# Altium PCB ps2-blueretro.PcbDoc
Units mm, origin at the board's own origin, x right, y up, seen from the top; angles counter-clockwise.
Board outline 70 x 50 mm, 2 copper layers (Top Layer, Bottom Layer); 51 components, 56 nets, 202 pads, 38 vias.
Unrouted connection lines stored in the file: 1.
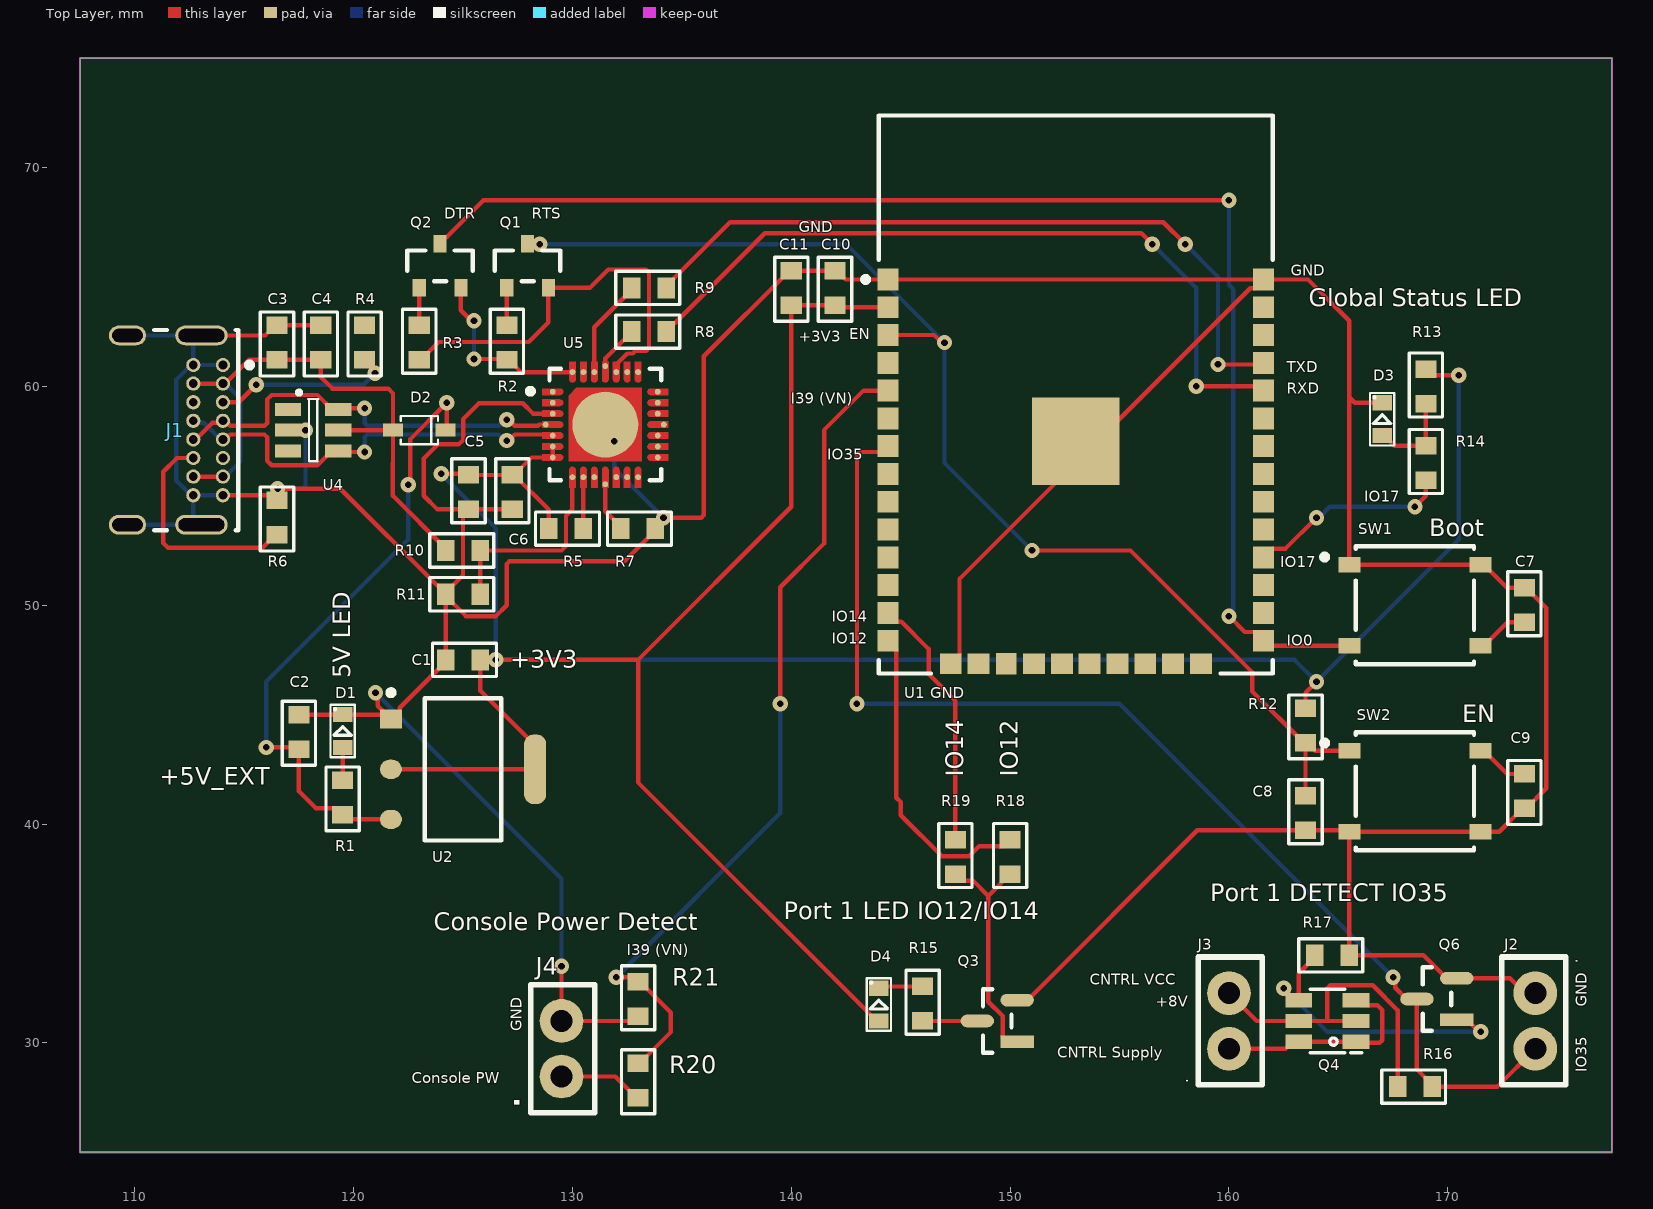
[diagram p0: Top Layer view]
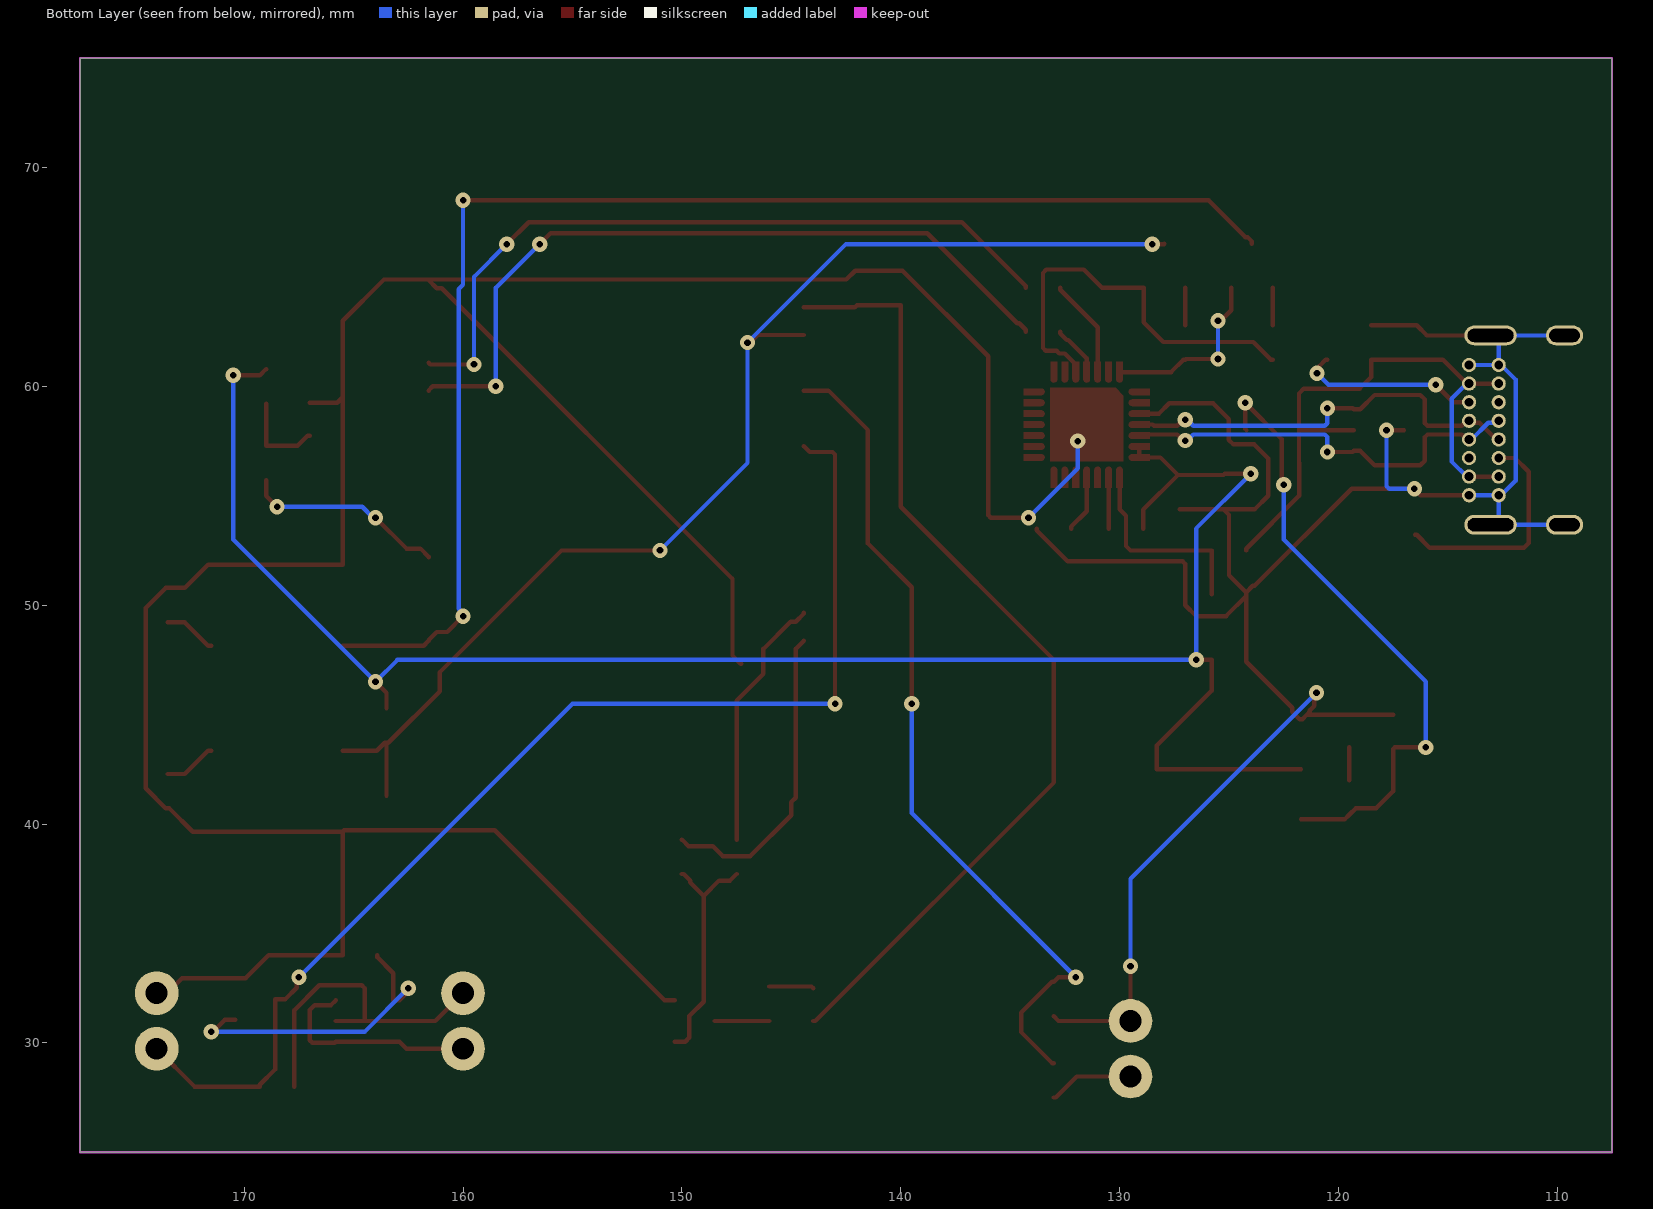
[diagram p1: Bottom Layer view, seen from below]
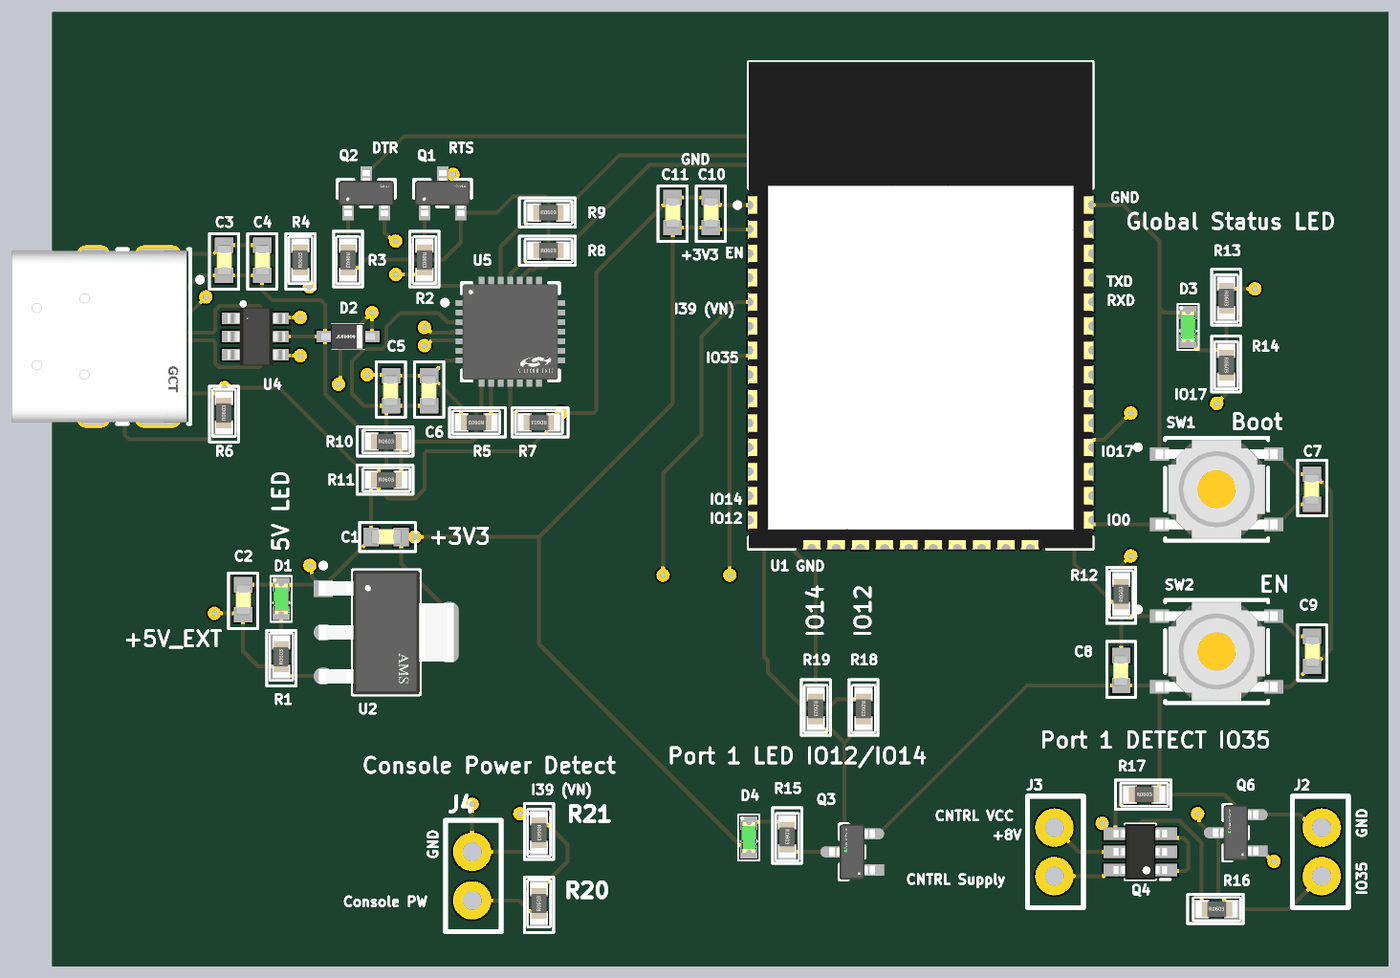
[diagram p2: 3D render of the assembled board from above, using the file's embedded part models]

## Layer stack, top to bottom
Top Solder: solder mask 0.0102, Solder Resist, Dk 3.5
Top Layer: signal copper 0.0356
Dielectric 1: dielectric 0.32, FR-4, Dk 4.8
Bottom Layer: signal copper 0.0356
Bottom Solder: solder mask 0.0102, Solder Resist, Dk 3.5

## Board outline
107.5,25 177.5,25 177.5,75 107.5,75

## Design rules (kind name [scope] priority, off if disabled: settings)
Clearance [All] p1: gap=0.254 ignorepadtopadclearanceinfootprint=FALSE except(0: Arc-Hole Track-Hole SMDPad-Hole THPad-Hole Via-Hole Fill-Hole Poly-Hole Region-Hole Text-Hole)
DiffPairsRouting DiffPairsRouting_1 [All] p1 off: maxlimit=0.5 minlimit=0.15 mostfreqgap=0.2 toplayer_minwidth=0.2 toplayer_maxwidth=0.2 toplayer_prefwidth=0.2 bottomlayer_minwidth=0.2 bottomlayer_maxwidth=0.2 bottomlayer_prefwidth=0.2 maxuncoupledlength=12.7
DiffPairsRouting USB_DATA [InDifferentialPair('USB_DATA')] p2: maxlimit=0.5 minlimit=0.15 mostfreqgap=0.2 toplayer_minwidth=0.2 toplayer_maxwidth=0.2 toplayer_prefwidth=0.2 bottomlayer_minwidth=0.2 bottomlayer_maxwidth=0.2 bottomlayer_prefwidth=0.2 maxuncoupledlength=12.7
MatchedLengths [InDifferentialPair('USB_DATA')] p1: tolerance=0.051 checknetsindiffpair=TRUE checkdiffpairvsdiffpair=FALSE checkxsignals=FALSE checkothers=FALSE
PolygonConnect [All] p1: connectstyle=Relief reliefconductorwidth=0.254 reliefentries=4 polygonreliefangle="90 Angle" airgapwidth=0.254
RoomDefinition U_06-DETECT-ps2-blueretro [InComponentClass('U_06-DETECT-ps2-blueretro')] p1: confinementstyle=ConfineIn formatcopy=TRUE lockcomponents=FALSE outline 179,27.5 197,27.5 197,35 179,35
RoomDefinition U_03-PSU-ps2-blueretro [InComponentClass('U_03-PSU-ps2-blueretro')] p2: confinementstyle=ConfineIn formatcopy=TRUE lockcomponents=FALSE outline 0,0 280.5,0 280.5,143.5 0,143.5
RoomDefinition U_02-USB-ps2-blueretro [InComponentClass('U_02-USB-ps2-blueretro')] p3: confinementstyle=ConfineIn formatcopy=TRUE lockcomponents=FALSE outline 2.6,0 294.6,0 294.6,168.8 2.6,168.8
RoomDefinition U_04-CTRL1-ps2-blueretro [InComponentClass('U_04-CTRL1-ps2-blueretro')] p4: confinementstyle=ConfineIn formatcopy=TRUE lockcomponents=FALSE outline 0,0 205.1,0 205.1,145.6 0,145.6
RoutingVias [All] p1: holewidth=0.3 width=0.7 viastyle="Through Hole" minholewidth=0.3 minwidth=0.7 maxholewidth=0.45 maxwidth=1.27
SolderMaskExpansion [All] p1: expansion=0.102 istentingtop=FALSE
Width [All] p1: maxlimit=1 minlimit=0.2 preferedwidth=0.2
29 further rules are at their usual default settings.

## Classes and differential pairs
component class U_06-DETECT-ps2-blueretro: J4 R20 R21
component class U_04-CTRL1-ps2-blueretro: D4 J2 J3 Q3 Q4 Q6 R15 R16 R17 R18 R19
component class U_01-ESP32-ps2-blueretro: C7 C8 C9 C10 C11 D3 R12 R13 R14 SW1 SW2 U1
component class U_02-USB-ps2-blueretro: C3 C4 C5 C6 D2 J1 Q1 Q2 R2 R3 R4 R5 R6 R7 R8 R9 R10 R11 U4 U5
component class U_03-PSU-ps2-blueretro: C1 C2 D1 R1 U2
differential pair USB_DATA: +USB_DATA_P -USB_DATA_N

## Components (designator, comment, footprint, x,y, rotation, side; value= is the part's Value field where it differs from the comment)
C1 "cap_0603" cap_0603 125,47.5 r0 top value=22uF/10V
C2 "cap_0603" cap_0603 117.5,44.213 r270 top value=22uF/10V
C3 "cap_0603" cap_0603 116.5,62 r270 top value=1uF
C4 "cap_0603" cap_0603 118.5,62 r270 top value=0.1uF/50V
C5 "cap_0603" cap_0603 125.25,55.163 r90 top value=10uF/10V
C6 "cap_0603" cap_0603 127.25,55.163 r90 top value=0.1uF/50V
C7 "cap_0603" cap_0603 173.5,50 r90 top value=0.1uF/50V
C8 "cap_0603" cap_0603 163.5,40.5 r90 top value=0.1uF/50V
C9 "cap_0603" cap_0603 173.5,41.5 r270 top value=0.1uF/50V
C10 "cap_0603" cap_0603 142,64.5 r270 top value=22uF/10V
C11 "cap_0603" cap_0603 140,64.5 r270 top value=0.1uF/50V
D1 "led_0603" led0603_GREEN 119.5,44.25 r90 top value=Green
D2 "BAT760-7" sod-323 123,58 r180 top
D3 "led_0603" led0603_GREEN 167,58.5 r90 top value=Green
D4 "led_0603" led0603_GREEN 144,31.75 r90 top value=Green
J1 "USB4085-GF-A" FP-USB4085-GF-A-MFG 110,58 r270 top
J2 "2 Pole 2.54mm" 2.54mm_2pole 174,31 r270 top
J3 "2 Pole 2.54mm" 2.54mm_2pole 160,31 r90 top
J4 "2 Pole 2.54mm" 2.54mm_2pole 129.5,29.73 r90 top
Q1 "SS8050-G" FP-SS8050-G-MFG 127.95,65.51 r90 top
Q2 "SS8050-G" FP-SS8050-G-MFG 123.95,65.51 r90 top
Q3 "BSS138" FP-318-08-IPC_B 149.41,31 r180 top
Q4 "PJS6839" SOT23-6 164.5,31 r90 top
Q6 "BSS138" FP-318-08-IPC_B 169.5,32 r180 top
R1 "res_0603" res_0603 119.5,41.213 r270 top value=2k
R2 "res_0603" res_0603 127,62 r90 top value=10k
R3 "res_0603" res_0603 123,62 r90 top value=10k
R4 "res_0603" res_0603 120.5,62 r270 top value=5k1
R5 "res_0603" res_0603 129.712,53.5 r0 top value=2k
R6 "res_0603" res_0603 116.5,54 r270 top value=5k1
R7 "res_0603" res_0603 133,53.5 r0 top value=10k
R8 "res_0603" res_0603 133.5,62.5 r180 top value=0R
R9 "res_0603" res_0603 133.5,64.5 r180 top value=0R
R10 "res_0603" res_0603 125,52.5 r180 top value=22k1
R11 "res_0603" res_0603 125,50.5 r180 top value=47k5
R12 "res_0603" res_0603 163.5,44.5 r270 top value=10k
R13 "res_0603" res_0603 169,60 r90 top value=1k
R14 "res_0603" res_0603 169,56.5 r90 top value=1k
R15 "res_0603" res_0603 146,31.787 r90 top value=64R9
R16 "res_0603" res_0603 168.5,28 r180 top value=100k
R17 "res_0603" res_0603 164.713,34 r180 top value=4k7
R18 "res_0603" res_0603 150,38.5 r90 top value=0R
R19 "res_0603" res_0603 147.5,38.5 r90 top value=0R
R20 "res_0603" res_0603 133,28.288 r270 top value=10k
R21 "res_0603" res_0603 133,32 r90 top value=20k
SW1 "PTS526SK15SMTR2LFS" FP-PTS526SK15SMTR2LFS-MFG 168.5,50 r0 top
SW2 "PTS526SK15SMTR2LFS" FP-PTS526SK15SMTR2LFS-MFG 168.5,41.5 r0 top
U1 "ESP-WROOM-32" OLMX-ESP-WROOM-32 153,56.105 r0 top
U2 "AMS1117-3.3" FP-AMS1117-IPC_C 125,42.5 r0 top
U4 "USBLC6-2SC6" sot23-6l 117,58.95 r0 top
U5 "CP2102N-A02-GQFN28R" FP-CP2102N-A02-GQFN28R-MFG 131.5,58.25 r0 top

## Footprints (in the part's own frame and the unit in brackets; to place one, negate y for a bottom-side part, rotate by r counter-clockwise, add the part's x,y. Pads: shape width x height; smd on the part's side, far side on the other; paste and mask are expansions set on the pad)
2.54mm_2pole [mm]
  round 2 hole 1: 1(-1.27,0) 2(1.27,0)
  silkscreen extent -2.92,-1.52 2.92,1.4
cap_0603 [mm]
  rect 0.8x0.965 smd: 1(-0.787,0) 2(0.788,0)
  silkscreen extent -1.4,-0.76 1.52,0.76, body extent -0.8,-0.38 0.8,0.42, height 0.8
FP-318-08-IPC_B [mm]
  rect 1.524x0.578 smd paste+0 mask+0: 1(-0.91,0.95)
  rrect100% 1.524x0.578 smd paste+0 mask+0: 2(-0.91,-0.95) 3(0.91,0)
  silkscreen extent -0.65,-1.45 0.65,1.45, body extent -1.92,-1.7 1.92,1.7, height 0.25
FP-AMS1117-IPC_C [mm]
  rect 1.004x0.872 smd paste+0 mask+0: 1(-3.295,2.29)
  rrect100% 1.004x0.872 smd paste+0 mask+0: 2(-3.295,0) 3(-3.295,-2.29)
  rrect87% 1.004x3.182 smd paste+0 mask+0: 4(3.295,0)
  silkscreen extent -3.42,-3.25 1.75,3.62, body extent -3.9,-3.35 3.9,3.35, height 0.25
FP-CP2102N-A02-GQFN28R-MFG [mm]
  round 0.27 smd paste+0 mask+0: 1(-2.4,1.5) 2(-2.4,1) 3(-2.4,0.5) 4(-2.725,0) 5(-2.4,-0.5) 6(-2.4,-1) 7(-2.4,-1.5) 8(-1.5,-2.4) 9(-1,-2.4) 10(-0.5,-2.4) 11(0,-2.725) 12(0.5,-2.4) 13(1,-2.4) 14(1.5,-2.4) 15(2.4,-1.5) 16(2.4,-1) 17(2.4,-0.5) 18(2.675,0) 19(2.4,0.5) 20(2.4,1) 21(2.4,1.5) 22(1.5,2.4) 23(1,2.4) 24(0.5,2.4) 25(0,2.675) 26(-0.5,2.4) 27(-1,2.4) 28(-1.5,2.4)
  round 3.015 smd paste-1000 mask+0: 29(0,0)
  Top Layer region: -1.325,1.675 1.675,1.675 1.675,-1.675 -1.675,-1.675 -1.675,1.325 -1.325,1.675
  Top Layer region: -1.35,2.875 -1.35,2.075 -1.361,2.018 -1.394,1.969 -1.443,1.936 -1.5,1.925 -1.5,1.925 -1.557,1.936 -1.606,1.969 -1.639,2.018 -1.65,2.075 -1.65,2.075 -1.65,2.875
  Top Layer region: -0.85,2.875 -0.85,2.075 -0.861,2.018 -0.894,1.969 -0.943,1.936 -1,1.925 -1,1.925 -1.057,1.936 -1.106,1.969 -1.139,2.018 -1.15,2.075 -1.15,2.075 -1.15,2.875
  Top Layer region: -0.35,2.875 -0.35,2.075 -0.361,2.018 -0.394,1.969 -0.443,1.936 -0.5,1.925 -0.5,1.925 -0.557,1.936 -0.606,1.969 -0.639,2.018 -0.65,2.075 -0.65,2.075 -0.65,2.875
  Top Layer region: 0.15,2.875 0.15,2.075 0.139,2.018 0.106,1.969 0.057,1.936 0,1.925 0,1.925 -0.057,1.936 -0.106,1.969 -0.139,2.018 -0.15,2.075 -0.15,2.075 -0.15,2.875
  Top Layer region: 0.65,2.875 0.65,2.075 0.639,2.018 0.606,1.969 0.557,1.936 0.5,1.925 0.5,1.925 0.443,1.936 0.394,1.969 0.361,2.018 0.35,2.075 0.35,2.075 0.35,2.875
  Top Layer region: 1.15,2.875 1.15,2.075 1.139,2.018 1.106,1.969 1.057,1.936 1,1.925 1,1.925 0.943,1.936 0.894,1.969 0.861,2.018 0.85,2.075 0.85,2.075 0.85,2.875
  Top Layer region: 1.65,2.875 1.65,2.075 1.639,2.018 1.606,1.969 1.557,1.936 1.5,1.925 1.5,1.925 1.443,1.936 1.394,1.969 1.361,2.018 1.35,2.075 1.35,2.075 1.35,2.875
  Top Layer region: 2.875,1.35 2.075,1.35 2.018,1.361 1.969,1.394 1.936,1.443 1.925,1.5 1.925,1.5 1.936,1.557 1.969,1.606 2.018,1.639 2.075,1.65 2.075,1.65 2.875,1.65
  Top Layer region: 2.875,0.85 2.075,0.85 2.018,0.861 1.969,0.894 1.936,0.943 1.925,1 1.925,1 1.936,1.057 1.969,1.106 2.018,1.139 2.075,1.15 2.075,1.15 2.875,1.15
  Top Layer region: 2.875,0.35 2.075,0.35 2.018,0.361 1.969,0.394 1.936,0.443 1.925,0.5 1.925,0.5 1.936,0.557 1.969,0.606 2.018,0.639 2.075,0.65 2.075,0.65 2.875,0.65
  Top Layer region: 2.875,-0.15 2.075,-0.15 2.018,-0.139 1.969,-0.106 1.936,-0.057 1.925,0 1.925,0 1.936,0.057 1.969,0.106 2.018,0.139 2.075,0.15 2.075,0.15 2.875,0.15
  Top Layer region: 2.875,-0.65 2.075,-0.65 2.018,-0.639 1.969,-0.606 1.936,-0.557 1.925,-0.5 1.925,-0.5 1.936,-0.443 1.969,-0.394 2.018,-0.361 2.075,-0.35 2.075,-0.35 2.875,-0.35
  Top Layer region: 2.875,-1.15 2.075,-1.15 2.018,-1.139 1.969,-1.106 1.936,-1.057 1.925,-1 1.925,-1 1.936,-0.943 1.969,-0.894 2.018,-0.861 2.075,-0.85 2.075,-0.85 2.875,-0.85
  Top Layer region: 2.875,-1.65 2.075,-1.65 2.018,-1.639 1.969,-1.606 1.936,-1.557 1.925,-1.5 1.925,-1.5 1.936,-1.443 1.969,-1.394 2.018,-1.361 2.075,-1.35 2.075,-1.35 2.875,-1.35
  Top Layer region: 1.35,-2.875 1.35,-2.075 1.361,-2.018 1.394,-1.969 1.443,-1.936 1.5,-1.925 1.5,-1.925 1.557,-1.936 1.606,-1.969 1.639,-2.018 1.65,-2.075 1.65,-2.075 1.65,-2.875
  Top Layer region: 0.85,-2.875 0.85,-2.075 0.861,-2.018 0.894,-1.969 0.943,-1.936 1,-1.925 1,-1.925 1.057,-1.936 1.106,-1.969 1.139,-2.018 1.15,-2.075 1.15,-2.075 1.15,-2.875
  Top Layer region: 0.35,-2.875 0.35,-2.075 0.361,-2.018 0.394,-1.969 0.443,-1.936 0.5,-1.925 0.5,-1.925 0.557,-1.936 0.606,-1.969 0.639,-2.018 0.65,-2.075 0.65,-2.075 0.65,-2.875
  Top Layer region: -0.15,-2.875 -0.15,-2.075 -0.139,-2.018 -0.106,-1.969 -0.057,-1.936 0,-1.925 0,-1.925 0.057,-1.936 0.106,-1.969 0.139,-2.018 0.15,-2.075 0.15,-2.075 0.15,-2.875
  Top Layer region: -0.65,-2.875 -0.65,-2.075 -0.639,-2.018 -0.606,-1.969 -0.557,-1.936 -0.5,-1.925 -0.5,-1.925 -0.443,-1.936 -0.394,-1.969 -0.361,-2.018 -0.35,-2.075 -0.35,-2.075 -0.35,-2.875
  Top Layer region: -1.15,-2.875 -1.15,-2.075 -1.139,-2.018 -1.106,-1.969 -1.057,-1.936 -1,-1.925 -1,-1.925 -0.943,-1.936 -0.894,-1.969 -0.861,-2.018 -0.85,-2.075 -0.85,-2.075 -0.85,-2.875
  Top Layer region: -1.65,-2.875 -1.65,-2.075 -1.639,-2.018 -1.606,-1.969 -1.557,-1.936 -1.5,-1.925 -1.5,-1.925 -1.443,-1.936 -1.394,-1.969 -1.361,-2.018 -1.35,-2.075 -1.35,-2.075 -1.35,-2.875
  Top Layer region: -2.875,-1.35 -2.075,-1.35 -2.018,-1.361 -1.969,-1.394 -1.936,-1.443 -1.925,-1.5 -1.925,-1.5 -1.936,-1.557 -1.969,-1.606 -2.018,-1.639 -2.075,-1.65 -2.075,-1.65 -2.875,-1.65
  Top Layer region: -2.875,-0.85 -2.075,-0.85 -2.018,-0.861 -1.969,-0.894 -1.936,-0.943 -1.925,-1 -1.925,-1 -1.936,-1.057 -1.969,-1.106 -2.018,-1.139 -2.075,-1.15 -2.075,-1.15 -2.875,-1.15
  Top Layer region: -2.875,-0.35 -2.075,-0.35 -2.018,-0.361 -1.969,-0.394 -1.936,-0.443 -1.925,-0.5 -1.925,-0.5 -1.936,-0.557 -1.969,-0.606 -2.018,-0.639 -2.075,-0.65 -2.075,-0.65 -2.875,-0.65
  Top Layer region: -2.875,0.15 -2.075,0.15 -2.018,0.139 -1.969,0.106 -1.936,0.057 -1.925,0 -1.925,0 -1.936,-0.057 -1.969,-0.106 -2.018,-0.139 -2.075,-0.15 -2.075,-0.15 -2.875,-0.15
  Top Layer region: -2.875,0.65 -2.075,0.65 -2.018,0.639 -1.969,0.606 -1.936,0.557 -1.925,0.5 -1.925,0.5 -1.936,0.443 -1.969,0.394 -2.018,0.361 -2.075,0.35 -2.075,0.35 -2.875,0.35
  Top Layer region: -2.875,1.15 -2.075,1.15 -2.018,1.139 -1.969,1.106 -1.936,1.057 -1.925,1 -1.925,1 -1.936,0.943 -1.969,0.894 -2.018,0.861 -2.075,0.85 -2.075,0.85 -2.875,0.85
  Top Layer region: -2.875,1.65 -2.075,1.65 -2.018,1.639 -1.969,1.606 -1.936,1.557 -1.925,1.5 -1.925,1.5 -1.936,1.443 -1.969,1.394 -2.018,1.361 -2.075,1.35 -2.075,1.35 -2.875,1.35
  silkscreen extent -3.55,-2.55 2.55,2.55, body extent -2.98,-2.98 2.98,2.98, height 0.25
FP-PTS526SK15SMTR2LFS-MFG [mm]
  rect 1x0.7 smd paste+0 mask+0: 1(-3,1.85) 2(3,1.85) 3(-3,-1.85) 4(3,-1.85)
  silkscreen extent -4.25,-2.7 2.7,2.7, body extent -3.6,-2.8 3.6,2.8, height 0.25
FP-SS8050-G-MFG [mm]
  rect 0.8x0.6 smd paste+0 mask+0: 1(-1.01,0.95) 2(-1.01,-0.95) 3(1.01,0)
  silkscreen extent -0.7,-1.5 0.7,1.5, body extent -1.51,-1.6 1.51,1.6, height 0.25
FP-USB4085-GF-A-MFG [mm]
  rrect100% 0.9x2.4 hole 2.1 slot 0.6 at 0 deg paste-1000 mask+0: 1(-4.325,3.045) 2(4.325,3.045)
  rrect100% 0.9x1.7 hole 1.4 slot 0.6 at 0 deg paste-1000 mask+0: 3(-4.325,-0.335) 4(4.325,-0.335)
  round 0.65 hole 0.4 paste-1000 mask+0: A1(-2.975,4.025) A4(-2.125,4.025) A5(-1.275,4.025) A6(-0.425,4.025) A7(0.425,4.025) A8(1.275,4.025) A9(2.125,4.025) A12(2.975,4.025) B1(2.975,2.675) B4(2.125,2.675) B5(1.275,2.675) B6(0.425,2.675) B7(-0.425,2.675) B8(-1.275,2.675) B9(-2.125,2.675) B12(-2.975,2.675)
  silkscreen extent -4.57,0.89 4.57,5.37, body extent -4.87,-4.83 4.87,4.83, height 0.25
led0603_GREEN [mm] "LED Green, 2-Leads, Body 1.6x0.8mm"
  rect 0.7x0.9 smd: 1(-0.75,0) 2(0.75,0)
  silkscreen extent -1.2,-0.55 1.2,0.55, body extent -0.81,-0.4 0.81,0.4, height 0.6
OLMX-ESP-WROOM-32 [mm] "SMD, 38-Leads, Body 18x25.5mm, Pitch 1.27mm"
  rect 0.95x1 smd: 1(-8.575,8.78) 2(-8.575,7.51) 3(-8.575,6.24) 4(-8.575,4.97) 5(-8.575,3.7) 6(-8.575,2.43) 7(-8.575,1.16) 8(-8.575,-0.11) 9(-8.575,-1.38) 10(-8.575,-2.65) 11(-8.575,-3.92) 12(-8.575,-5.19) 13(-8.575,-6.46) 14(-8.575,-7.73) 17(-3.175,-8.78) 25(8.575,-7.73) 26(8.575,-6.46) 27(8.575,-5.19) 28(8.575,-3.92) 29(8.575,-2.65) 30(8.575,-1.38) 31(8.575,-0.11) 32(8.575,1.16) 33(8.575,2.43) 34(8.575,3.7) 35(8.575,4.97) 36(8.575,6.24) 37(8.575,7.51) 38(8.575,8.78)
  rect 4x4 smd: 1(0,1.395)
  rect 1x0.95 smd: 15(-5.715,-8.78) 16(-4.445,-8.78) 18(-1.905,-8.78) 19(-0.635,-8.78) 20(0.635,-8.78) 21(1.905,-8.78) 22(3.175,-8.78) 23(4.445,-8.78) 24(5.715,-8.78)
  silkscreen extent -9.72,-9.23 9,16.27, body extent -9.04,-9.25 9.04,16.29, height 3.04
res_0603 [mm]
  rect 0.8x0.965 smd: 1(-0.787,0) 2(0.788,0)
  silkscreen extent -1.4,-0.76 1.52,0.76, body extent -1.3,-0.67 1.3,0.67, height 0.47
sod-323 [mm]
  rect 0.9x0.6 smd: 1(-1.2,0) 2(1.2,0)
  silkscreen extent -0.85,-0.65 0.85,0.65, body extent -1.4,-0.67 1.4,0.68, height 0.75
SOT23-6 [mm]
  rect 0.65x1.22 smd: 1(-0.95,-1.31) 2(0,-1.31) 3(0.95,-1.31) 4(0.95,1.31) 5(0,1.31) 6(-0.95,1.31)
  silkscreen extent -1.45,-1.57 1.45,0.8, body extent -1.45,-1.4 1.45,1.4, height 1.45
sot23-6l [mm]
  rect 1.2x0.6 smd: 1(0,0) 2(0,-0.95) 3(0,-1.9) 4(2.3,-1.9) 5(2.3,-0.95) 6(2.3,0)
  silkscreen extent 0.45,-2.38 1.39,0.82, body extent -0.3,-2.47 2.7,0.57, height 1.45

## Part data
D1 D3 D4: "Green 3,2V 20mA", Manufacturer="Würth Elektronik", Manufacturer Part Number=150060GS75000, Supplier Part Number=732-4971-1-ND, ComponentLink1Description="Supplier Link", ComponentLink1URL=https://www.digikey.at/de/products/detail/w%C3%BCrth-elektronik/150060GS75000/4489898, ComponentLink2Description="Manufacturer Link", ComponentLink3Description="Datasheet Link", ComponentLink3URL=https://www.we-online.com/components/products/datasheet/150060GS75000.pdf, Price=0,14, Supplier=Digikey
D2: "30V 1A, Vf=495mV @ 1A, Ir=50µA @ 15V Schottky Diode", Manufacturer="Diodes Incorporated", Supplier Part Number=BAT760DICT-ND, ComponentLink1Description="Supplier Link", ComponentLink1URL=https://www.digikey.at/de/products/detail/diodes-incorporated/BAT760-7/697106, ComponentLink2Description="Manufacturer Link", ComponentLink3Description="Datasheet Link", ComponentLink3URL=https://www.diodes.com/assets/Datasheets/BAT760.pdf, Manufacturer Part Number=BAT760-7, Price=0,48, Supplier=Digikey
J1: library part CMP-196119-000001-2, "CONN RCPT USB2.0 TYPE C 24POS RA", Contact Material="Copper Alloy", Contact Plating=Gold, Gender=Receptacle, Number of Positions=16, Orientation="Right Angle", Usb Standard="USB 2.0"
J2 J3 J4: "Solder contacts for a 2.54mm connector"
Q1 Q2: library part CMP-20235-000001-1, "NPN TRANSISTOR 1.5A 40V SOT-23 R", Case/Package=TO-236-3, Collector Emitter Breakdown Voltage=25V, Collector Emitter Voltage (VCEO)=400mV, Max Collector Current=1.5A, Max Power Dissipation=300mW, Transition Frequency=100MHz, Max Breakdown Voltage=25V, Mount="Surface Mount", Packaging="Tape and Reel", RoHS Compliant=Yes
Q3 Q6: library part CMP-07173-000101-1, "MOSFET N-CH 50V 220MA SOT-23", Case/Package=SOT-23, Continuous Drain Current (ID)=220mA, Drain to Source Breakdown Voltage=50V, Drain to Source Resistance=3.5R, Gate to Source Voltage (Vgs)=20V, Input Capacitance=27pF, Max Operating Temperature=150°C, Max Power Dissipation=360mW, Min Operating Temperature=-55°C, On-State Resistance=6R, Package Quantity=1, Threshold Voltage=1.3V, Contact Plating=Tin, Current Rating=220mA, Drain to Source Voltage (Vdss)=50V, Dual Supply Voltage=50V, Element Configuration=Single, Fall Time=9ns, Height=0.93mm, Lead Free="Lead Free", Length=2.92mm, Mount="Surface Mount", Nominal Vgs=1.3V, Number of Elements=1, Number of Pins=3, Packaging="Tape and Reel", Power Dissipation=360mW, Radiation Hardening=No, Rds On Max=3.5R, REACH SVHC="No SVHC", Rise Time=9ns, Termination=SMD/SMT, Turn-Off Delay Time=20ns, Turn-On Delay Time=2.5ns, Voltage Rating (DC)=50V, Weight=0.03g, Width=1.3mm
Q4: "MOSFET P-CH 60V 300mA SOT-23-6", Manufacturer="Panjit International Inc.", Manufacturer Part Number=PJS6839_S1_00001, Supplier Part Number=3757-PJS6839_S1_00001CT-ND, ComponentLink1Description=Datasheet, ComponentLink1URL=https://www.panjit.com.tw/upload/datasheet/PJS6839.pdf, ComponentLink2Description=Supplier, ComponentLink2URL=https://www.digikey.at/en/products/detail/panjit-international-inc/PJS6839-S1-00001/15799236, Price=0.28, Supplier=Digikey
SW1 SW2: library part CMP-10040-000013-1, "TACT 5.2 X 5.2, 1.5 MM H, 260GF,", Contact Current Rating=50mA, Contact Resistance=100mΩ, Manufacturer=C&K, Operating Force=250gf, Temperature="-20°C to +70°C", Temperature Range High=+70°C, Temperature Range Low=-20°C, Voltage Rating Dc=12V, Automotive=No, Category=Switch, ComponentLink2Description=Datasheet, ComponentLink2URL=https://www.ckswitches.com/media/2780/pts526.pdf, Device Class L1=Electromechanical, Device Class L2=Switches, Device Class L3="Tactile Switches", Digikey Description="TACT 5.2 X 5.2, 1.5 MM H, 260GF,", Electromechanical Life=200000Cycles, Height=1.65mm, Lead Free=Yes, Manufacturer Part Number=PTS526SK15SMTR2LFS, Octopart=https://octopart.com/pts526+sk15+smtr2+lfs-c%26k+components-100617999, Package=PTS526SK15SMTR2LFS, RoHS=TRUE, Standoff Height=0mm, Throw Configuration=SPST-NO
U1: library part CMP-2000-07454-1, "Espressif System, 2.7 to 3.6 V, -40 to 85 degC, 38-Pin SMD", Manufacturer=Olimex, Package Description="38-Pin Surface Mount Device, Body 18 x 25.5 mm, Pitch 1.27 mm", Datasheet URL=http://www.espressif.com/sites/default/files/documentation/esp-wroom-32_datasheet_en.pdf, Datasheet Version="Rev. 2.1, 09/2017", Manufacturer URL=https://www.olimex.com, Mounting Technology=SurfaceMount, Package Reference=ESP-WROOM-32, RoHSCompliant=false
U2: library part CMP-209535-000001-1, "LDO Voltage Regulators 1A, 3.3V", Dropout Voltage=1.1V, Manufacturer="Advanced Monolithic Systems", Max Junction Temp=+125°C, Max Power Dissipation=1.2W, Max Supply Voltage=15V, Nominal Supply Current=5mA, Output Current=1A, Output Voltage=3.3V, Package=AMS1117, Temperature="-40°C to +125°C", Temperature Range Low=-40°C, Automotive=No, Category=IC, ComponentLink2Description=Datasheet, ComponentLink2URL=http://www.advanced-monolithic.com/pdf/ds1117.pdf, Device Class L1="Integrated Circuits (ICs)", Device Class L2="Power Management ICs", Device Class L3="Voltage Regulators - Linear", Height=1.8mm, Ipc Land Pattern Name=SOT229P700X180-4, Lead Free=Yes, Manufacturer Part Number=AMS1117-3.3, Number Of Outputs=1, Octopart=https://octopart.com/ams1117-3.3-advanced+monolithic+systems-25899300, Output Type=Fixed, RoHS=TRUE, Standoff Height=0.64mm, Temperature Range High=+125°C
U4: "2.5V 5A, Vf=1.1V @ 10mA, Ir=6µA @ 2.5V ESD Protection Diode", Manufacturer=STMicroelectronics, Supplier Part Number=497-5235-1-ND, ComponentLink1Description="Supplier Link", ComponentLink1URL=https://www.digikey.at/de/products/detail/stmicroelectronics/USBLC6-2SC6/1040559, ComponentLink2Description="Manufacturer Link", ComponentLink3Description="Datasheet Link", ComponentLink3URL=https://www.st.com/content/ccc/resource/technical/document/datasheet/06/1d/48/9c/6c/20/4a/b2/CD00050750.pdf/files/CD00050750.pdf/jcr:content/translations/en.CD00050750.pdf, Manufacturer Part Number=USBLC6-2SC6, Price=0,32, Supplier=Digikey
U5: library part CMP-08093-000007-1, "IC USB TO UART BRIDGE QFN28"

## Via types
v1: diameter 0.7, hole 0.3, Top Layer to Bottom Layer, 38 vias

## Nets (pads, with @x,y where several pads share a name; then routed paths per layer and width w, separated by ;. In a path a pad name is that pad's centre, name@x,y a point inside that pad or via, vN(x,y) a via of type N, cw(c..) or ccw(c..) an arc to the next point about the centre after c; other vN are vias at no path point)
+3V3: C1.2 C5.2 C6.2 C10.2 C11.2 D4.1 R5.1 R12.1 R13.2 U1.2 U2.2 U2.4 U5.6 U5.7 | length 140.8
  Top Layer w0.2: U2.2 U2.4 128.295,43.589 125.788,46.096 C1.2 v1(126.5,47.5) 133,47.5 ; v1(124,56) 125.2,56 C5.2 C6.2 C6.2@127.333,55.95 ; R5.1 128.925,54.358 C6.2@127.333,55.95 ; U5.6 U5.7 128.132,56.75 C6.2@127.333,55.95 ; D4.1 143.9,31 133,41.9 133,47.5 ; U1.2 142.098,63.615 C10.2 C11.2 140,54.5 133,47.5 ; R12.1 163.5,46 v1(164,46.5) ; R13.2 169.287,60.5 v1(170.5,60.5)
  Bottom Layer w0.2: v1(124,56) 126.5,53.5 v1(126.5,47.5) 163,47.5 v1(164,46.5) 170.5,53 v1(170.5,60.5)
+5V_EXT: C2.2 D2.1 R1.2 U2.3 | length 28.6
  Top Layer w0.2: v1(116,43.5) 117.425,43.5 C2.2 117.5,41.5 118.275,40.725 119.2,40.725 R1.2 119.715,40.21 U2.3 ; v1(122.5,55.5) 122.596,55.596 122.596,57.596 v1(124.25,59.25) 124.25,58.05 D2.1
  Bottom Layer w0.2: v1(116,43.5) 116,46.5 122.5,53 v1(122.5,55.5)
+8V_CNTRL1: J3.2 Q4.2 Q4.5 R16.2 | length 15.1
  Top Layer w0.2: J3.2 161.27,31 Q4.5 164.5,31 ; Q4.2@165.81,31 164.5,31 ; R16.2 167.712,31.483 166.567,32.629 164.629,32.629 164.5,32.5 164.5,31
/RI: U5.2
/RST: R5.2 U5.9 | length 2.4
  Top Layer w0.2: R5.2 U5.9
/SUSPEND: R7.1 U5.11 | length 2.3
  Top Layer w0.2: U5.11 131.5,54.295 132.213,53.582 R7.1
CTS: U5.23
DCD: U5.1
DSR: U5.27
DTR: Q2.2 R2.1 U5.28 | length 8.3
  Top Layer w0.2: Q2.2 124.9,63.475 125.375,63 v1(125.5,63) ; v1(125.5,61.25) 126.962,61.25 R2.1 127.082,61.213 127.645,60.65 U5.28
  Bottom Layer w0.2: v1(125.5,61.25) v1(125.5,63)
GND: C1.1 C2.1 C3.1 C4.1 C5.1 C6.1 C7.2 C8.1 C9.2 C10.1 C11.1 D1.2 D3.2 J1.1 J1.2 J1.3 J1.4 J1.A1 J1.A12 J1.B1 J1.B12 J2.1 J4.2 Q3.2 Q6.2 R4.1 R6.1 R7.2 R11.2 R17.1 R21.1 SW1.1 SW1.2 SW2.3 SW2.4 U1.1 U1.15 U1.38 U2.1 U4.2 U5.3 U5.29 | length 249.7
  Top Layer w0.2: J1.1 115.955,62.325 116.418,62.787 C3.1 C4.1 ; J1.A12 R6.1@116.263,55.025 ; v1(116.525,55.325) 119.387,55.325 123.83,50.883 123.912,50.883 R11.2@124.212,50.582 ; U4.2 v1(117.8,58) ; C2.1 D1.2 U2.1@121.429,45 ; v1(121,46) 121.096,45.904 121.096,45.399 121.303,45.192 121.303,45.126 U2.1@121.429,45 ; C6.1 C5.1 ; U5.3 128.554,58.75 128.55,58.754 128.196,58.754 127.725,59.225 125.725,59.225 125.004,58.504 125.004,57.553 124.797,57.346 123.846,57.346 123.204,56.704 123.204,54.999 123.828,54.375 C5.1 ; v1(129.5,33.5) J4.2 132.787,31 R21.1 ; R7.2 133.788,53.418 132.37,52 127.117,52 127,51.883 127,50 126.5,49.5 125.13,49.5 R11.2@124.212,50.418 ; v1(134.16,54) 135.883,54 136,54.117 136,61.37 139.918,65.287 C11.1 C10.1 142.082,65.287 142.485,64.885 144.425,64.885 U1.38 ; U1.15 147.31,47.325 147.685,47.7 147.685,51.201 160.969,64.485 161.2,64.485 161.575,64.86 U1.38 ; Q3.2 150.793,31.95 158.556,39.712 C8.1 165.437,39.712 SW2.3 ; D3.2 165.75,59.25 165.5,59.5 ; J2.1 173.522,32.27 172.842,32.95 Q6.2 169.937,32.95 168.887,34 R17.1 SW2.3 ; U2.1@121.429,45 121.639,44.79 U2.1 121.771,44.79 122.107,45.126 122.107,45.312 124.212,47.417 C1.1 R11.2@124.212,50.418 ; R11.2@124.212,50.418 R11.2 R11.2@124.212,50.582 ; R11.2@124.212,50.582 125,51.37 125,54.125 C5.1 ; U1.38 163.615,64.885 165.5,63 165.5,59.5 ; SW2.3 SW2.4 172.355,39.65 173.417,40.712 C9.2 173.582,40.712 174.5,41.63 174.5,49.87 173.582,50.788 C7.2 172.712,50.788 171.65,51.85 SW1.2 SW1.1 165.5,59.5
  Bottom Layer w0.2: J1.4 J1.2@112.998,53.675 ; J1.3 J1.1@112.998,62.325 ; J1.2 J1.2@112.998,53.675 ; J1.1 J1.1@112.998,62.325 ; J1.A12 J1.B1 ; J1.A1 J1.B12 ; v1(116.525,55.325) 117.683,55.325 117.8,55.442 v1(117.8,58) ; v1(121,46) 129.5,37.5 v1(129.5,33.5) ; v1(131.91,57.5) 131.91,56.25 v1(134.16,54) ; J1.B1 112.565,55.025 111.9,55.69 111.9,60.31 112.565,60.975 J1.B12 ; J1.B1 112.675,53.998 J1.2@112.998,53.675 ; J1.B12 112.675,62.002 J1.1@112.998,62.325
I36: U1.4
IO5: U1.29
IO16: U1.27
IO17: R14.1 U1.28 | length 9.3
  Top Layer w0.2: U1.28 161.575,52.21 161.95,52.585 162.585,52.585 v1(164,54) ; v1(168.5,54.5) 169,55 R14.1
  Bottom Layer w0.2: v1(164,54) 164.111,54 164.611,54.5 v1(168.5,54.5)
IO18: U1.30
IO22: U1.36
IO23: U1.37
IO25: U1.10
IO26: U1.11
IO27: U1.12
NetC7_1: C7.1 SW1.4 | length 2.4
  Top Layer w0.2: SW1.4 171.65,48.15 172.712,49.212 C7.1
NetC8_2: C8.2 Q1.3 R12.2 SW2.1 U1.3 | length 56
  Top Layer w0.2: Q1.3 127.97,66.5 v1(128.5,66.5) ; U1.3 146.52,62.345 146.865,62 v1(147,62) ; v1(151,52.5) 155.5,52.5 161.059,46.941 161.059,46.071 163.417,43.712 R12.2 ; C8.2 R12.2 ; SW2.1 163.945,43.35 163.582,43.712 R12.2
  Bottom Layer w0.2: v1(128.5,66.5) 142.5,66.5 v1(147,62) 147,56.5 v1(151,52.5)
NetC9_1: C9.1 SW2.2 | length 2.4
  Top Layer w0.2: SW2.2 171.65,43.35 172.712,42.287 C9.1
NetD1_1: D1.1 R1.1 | length 1.5
  Top Layer w0.2: R1.1 D1.1
NetD3_1: D3.1 R13.1 R14.2 | length 4.1
  Top Layer w0.2: D3.1 167.1,57.75 167.562,57.287 R14.2 R13.1
NetD4_2: D4.2 R15.2 | length 2
  Top Layer w0.2: D4.2 144.075,32.575 R15.2
NetJ1_A5: J1.A5 R4.2 | length 8.4
  Top Layer w0.2: J1.A5 114.75,59.275 v1(115.55,60.075) ; R4.2 120.582,61.212 120.883,60.912 120.883,60.692 v1(120.975,60.6)
  Bottom Layer w0.2: v1(115.55,60.075) 120.45,60.075 v1(120.975,60.6)
NetJ1_B5: J1.B5 R6.2 | length 10.4
  Top Layer w0.2: J1.B5 111.925,56.725 111.3,56.1 111.3,52.842 111.517,52.625 115.83,52.625 116.418,53.212 R6.2
NetJ2_2: J2.2 Q6.3 R16.1 U1.7 | length 54.1
  Top Layer w0.2: v1(143,45.5) 143,56.883 143.117,57 144.16,57 U1.7 ; v1(167.5,33) 167.596,32.904 167.596,32.521 168.117,32 Q6.3 168.59,28.78 169.287,28.082 R16.1 172.27,28 J2.2
  Bottom Layer w0.2: v1(143,45.5) 155,45.5 v1(167.5,33)
NetJ3_1: J3.1 Q4.1 Q4.3 Q4.6 | length 10
  Top Layer w0.2: J3.1 162.585,29.73 162.905,30.05 Q4.6 Q4.1 165.86,30 166.883,30 167,30.117 167,31.5 166.775,31.725 166.035,31.725 Q4.3
NetJ4_1: J4.1 R20.2 | length 3.9
  Top Layer w0.2: J4.1 131.958,28.46 132.918,27.5 R20.2
NetQ1_1: Q1.1 R2.2 | length 1.7
  Top Layer w0.2: R2.2 Q1.1
NetQ2_1: Q2.1 R3.2 | length 1.7
  Top Layer w0.2: R3.2 Q2.1
NetQ2_3: Q2.3 SW1.3 U1.25 | length 62.2
  Top Layer w0.2: Q2.3 123.95,66.62 124.15,66.82 124.25,66.82 125.93,68.5 v1(160,68.5) ; v1(160,49.5) 160.725,48.775 161.2,48.775 161.575,48.4 U1.25 161.8,48.15 SW1.3
  Bottom Layer w0.2: v1(160,49.5) 160,49.635 160.204,49.839 160.204,64.435 160,64.639 v1(160,68.5)
NetQ3_1: Q3.1 R18.1 R19.1 | length 10.9
  Top Layer w0.2: R19.1 147.8,37.412 148.3,37.412 149,36.712 ; R18.1 149.918,37.713 149.617,37.412 149.617,37.33 149,36.712 ; Q3.1 149.847,30.05 149.658,30.239 149.658,31.224 149,31.882 149,36.712
NetQ3_3: Q3.3 R15.1 | length 2.5
  Top Layer w0.2: R15.1 Q3.3
NetQ4_4: Q4.4 Q6.1 R17.2 | length 14.5
  Top Layer w0.2: v1(162.5,32.5) 162.596,32.404 162.596,32.259 162.905,31.95 Q4.4 163.19,33.182 163.925,33.917 R17.2 ; Q6.1 170.883,31.05 171.433,30.5 v1(171.5,30.5)
  Bottom Layer w0.2: v1(162.5,32.5) 164.5,30.5 v1(171.5,30.5)
NetR8_1: R8.1 U1.34 | length 34.8
  Top Layer w0.2: R8.1 134.287,62.582 134.588,62.883 134.67,62.883 138.787,67 156,67 v1(156.5,66.5) ; v1(158.5,60) 161.38,60 U1.34
  Bottom Layer w0.2: v1(156.5,66.5) 158.5,64.5 v1(158.5,60)
NetR9_1: R9.1 U1.35 | length 33.6
  Top Layer w0.2: R9.1 134.287,64.582 137.205,67.5 157,67.5 v1(158,66.5) ; v1(159.5,61) 161.5,61 U1.35
  Bottom Layer w0.2: v1(158,66.5) 159.5,65 v1(159.5,61)
NetR10_1: R10.1 R11.1 U5.8 | length 9.3
  Top Layer w0.2: R11.1 R10.1 129.5,52.5 129.704,52.704 129.704,54.087 129.996,54.379 129.996,55.846 U5.8
NetR18_2: R18.2 U1.14 | length 14.3
  Top Layer w0.2: U1.14 144.8,48 144.8,41.2 145,41 145,40.404 146.871,38.533 148.129,38.533 148.583,38.987 149.7,38.987 R18.2
NetR19_2: R19.2 U1.13 | length 11.8
  Top Layer w0.2: U1.13 144.425,49.62 144.8,49.245 145.031,49.245 146.273,48.002 146.273,46.861 147.5,45.634 R19.2
NetR20_1: R20.1 R21.2 U1.5 | length 38.7
  Top Layer w0.2: v1(132,33) 132.788,33 R21.2 133.082,32.788 134.5,31.37 134.5,30.493 133.082,29.075 R20.1 ; v1(139.5,45.5) 139.5,50.818 141.5,52.818 141.5,58 143.305,59.805 U1.5
  Bottom Layer w0.2: v1(132,33) 139.5,40.5 v1(139.5,45.5)
NetU1_6: U1.6
NetU1_8: U1.8
NetU1_9: U1.9
NetU1_23: U1.23
NetU1_31: U1.31
NetU1_33: U1.33
RTS: Q1.2 R3.1 U5.24 | length 18.8
  Top Layer w0.2: R3.1 123.082,61.213 123.895,62.025 128,62.025 128.9,62.925 Q1.2 130.804,64.5 131.64,65.337 133.344,65.337 133.5,65.181 133.5,61.75 133.375,61.625 132.875,61.625 132.75,61.5 132.5,61.5 132,61 U5.24
RXD: R8.2 U5.25 | length 2.1
  Top Layer w0.2: U5.25 131.5,61.276 132.342,62.117 132.412,62.117 132.712,62.418 R8.2
TXD: R9.2 U5.26 | length 4.6
  Top Layer w0.2: U5.26 131,62.705 132.712,64.418 R9.2
USB_DATA_N: J1.A7 J1.B7 U4.4 U5.5 | length 19.4
  Top Layer w0.2: J1.A7 114.142,57.575 114.367,57.8 115.929,57.8 116.046,57.683 116.046,56.603 116.253,56.396 118.346,56.396 119,57.05 U4.4 119.35,57 v1(120.5,57) ; v1(127,57.523) 127.09,57.523 127.367,57.8 129.001,57.8 129.037,57.763 129.087,57.763 U5.5
  Bottom Layer w0.2: J1.B7 112.761,58.339 113.151,58.339 113.915,57.575 J1.A7 ; v1(120.5,57) 120.5,57.683 120.617,57.8 123.791,57.8 126.633,57.8 126.91,57.523 v1(127,57.523)
USB_DATA_P: J1.A6 J1.B6 U4.6 U5.4 | length 19
  Top Layer w0.2: J1.B6 112.785,57.575 113.549,58.339 113.939,58.339 J1.A6 114.142,58.425 114.367,58.2 115.929,58.2 116.046,58.317 116.046,59.397 116.253,59.604 118.346,59.604 119,58.95 U4.6 119.35,59 v1(120.5,59) ; v1(127,58.477) 127.09,58.477 127.367,58.2 128.424,58.2 128.478,58.254 128.771,58.254 U5.4
  Bottom Layer w0.2: v1(120.5,59) 120.5,58.317 120.617,58.2 123.625,58.2 126.633,58.2 126.91,58.477 v1(127,58.477)
VBUS_EXT: C3.2 C4.2 D2.2 J1.A4 J1.A9 J1.B4 J1.B9 R10.2 U4.5 | length 27.7
  Top Layer w0.2: J1.B4 J1.A9 ; J1.B9 114.135,60.125 115.223,61.212 C3.2 C4.2 118.5,60.425 119.029,59.896 121.579,59.896 121.8,59.675 D2.2 ; U4.5 D2.2 ; R10.2 124.212,52.583 121.796,54.999 121.796,56.502 121.8,56.506 D2.2
  Bottom Layer w0.2: J1.A9 114.135,55.875 114.825,56.565 114.825,59.435 114.135,60.125 J1.A4
pads on no net: J1.A8 J1.B8 U1.16 U1.17 U1.18 U1.19 U1.20 U1.21 U1.22 U1.24 U1.26 U1.32 U4.1 U4.3 U5.10 U5.12 U5.13 U5.14 U5.15 U5.16 U5.17 U5.18 U5.19 U5.20 U5.21 U5.22

## Keep-outs
Keep-Out Layer:
  the board outline again, w0.1

## Silkscreen, mask and mechanical layers (free items; w line width, h text height)
Top Overlay:
  text "DTR" at 124.15,67.65 h0.5
  text "RTS" at 128.15,67.65 h0.5
  text "GND" at 140.333,67.048 h0.5
  text "GND" at 162.833,65.048 h0.5
  text "Global Status LED" at 163.65,63.65 h0.8
  text "EN" at 142.65,62.15 h0.5
  text "+3V3" at 140.333,62.048 h0.5
  text "TXD" at 162.65,60.65 h0.5
  text "RXD" at 162.65,59.65 h0.5
  text "I39 (VN)" at 139.969,59.206 h0.5
  text "IO35" at 141.65,56.65 h0.5
  text "IO17" at 166.183,54.734 h0.5
  text "Boot" at 169.15,53.15 h0.8
  text "IO17" at 162.345,51.736 h0.5
  text "IO14" at 141.845,49.236 h0.5
  text "IO12" at 141.845,48.236 h0.5
  text "IO0" at 162.65,48.15 h0.5
  text "+3V3" at 127.15,47.15 h0.8
  text "5V LED" at 119.85,46.65 h0.8 r90
  text "GND" at 146.345,45.736 h0.5
  text "EN" at 170.65,44.65 h0.8
  text "IO14" at 147.85,42.15 h0.8 r90
  text "IO12" at 150.35,42.15 h0.8 r90
  text "+5V_EXT" at 111.15,41.783 h0.8
  text "Port 1 DETECT IO35" at 159.15,36.475 h0.8
  text "Port 1 LED IO12/IO14" at 139.65,35.65 h0.8
  text "Console Power Detect" at 123.65,35.15 h0.8
  text "I39 (VN)" at 132.491,34.011 h0.5
  text "CNTRL VCC" at 153.65,32.65 h0.5
  text "+8V" at 156.65,31.65 h0.5
  text "GND" at 176.35,31.65 h0.5 r90
  text "GND" at 127.691,30.537 h0.5 r90
  text "CNTRL Supply" at 152.15,29.317 h0.5
  text "IO35" at 176.35,28.65 h0.5 r90
  text "Console PW" at 122.65,28.15 h0.5